# EAGLE board MotorCC (EAGLE 6.4)
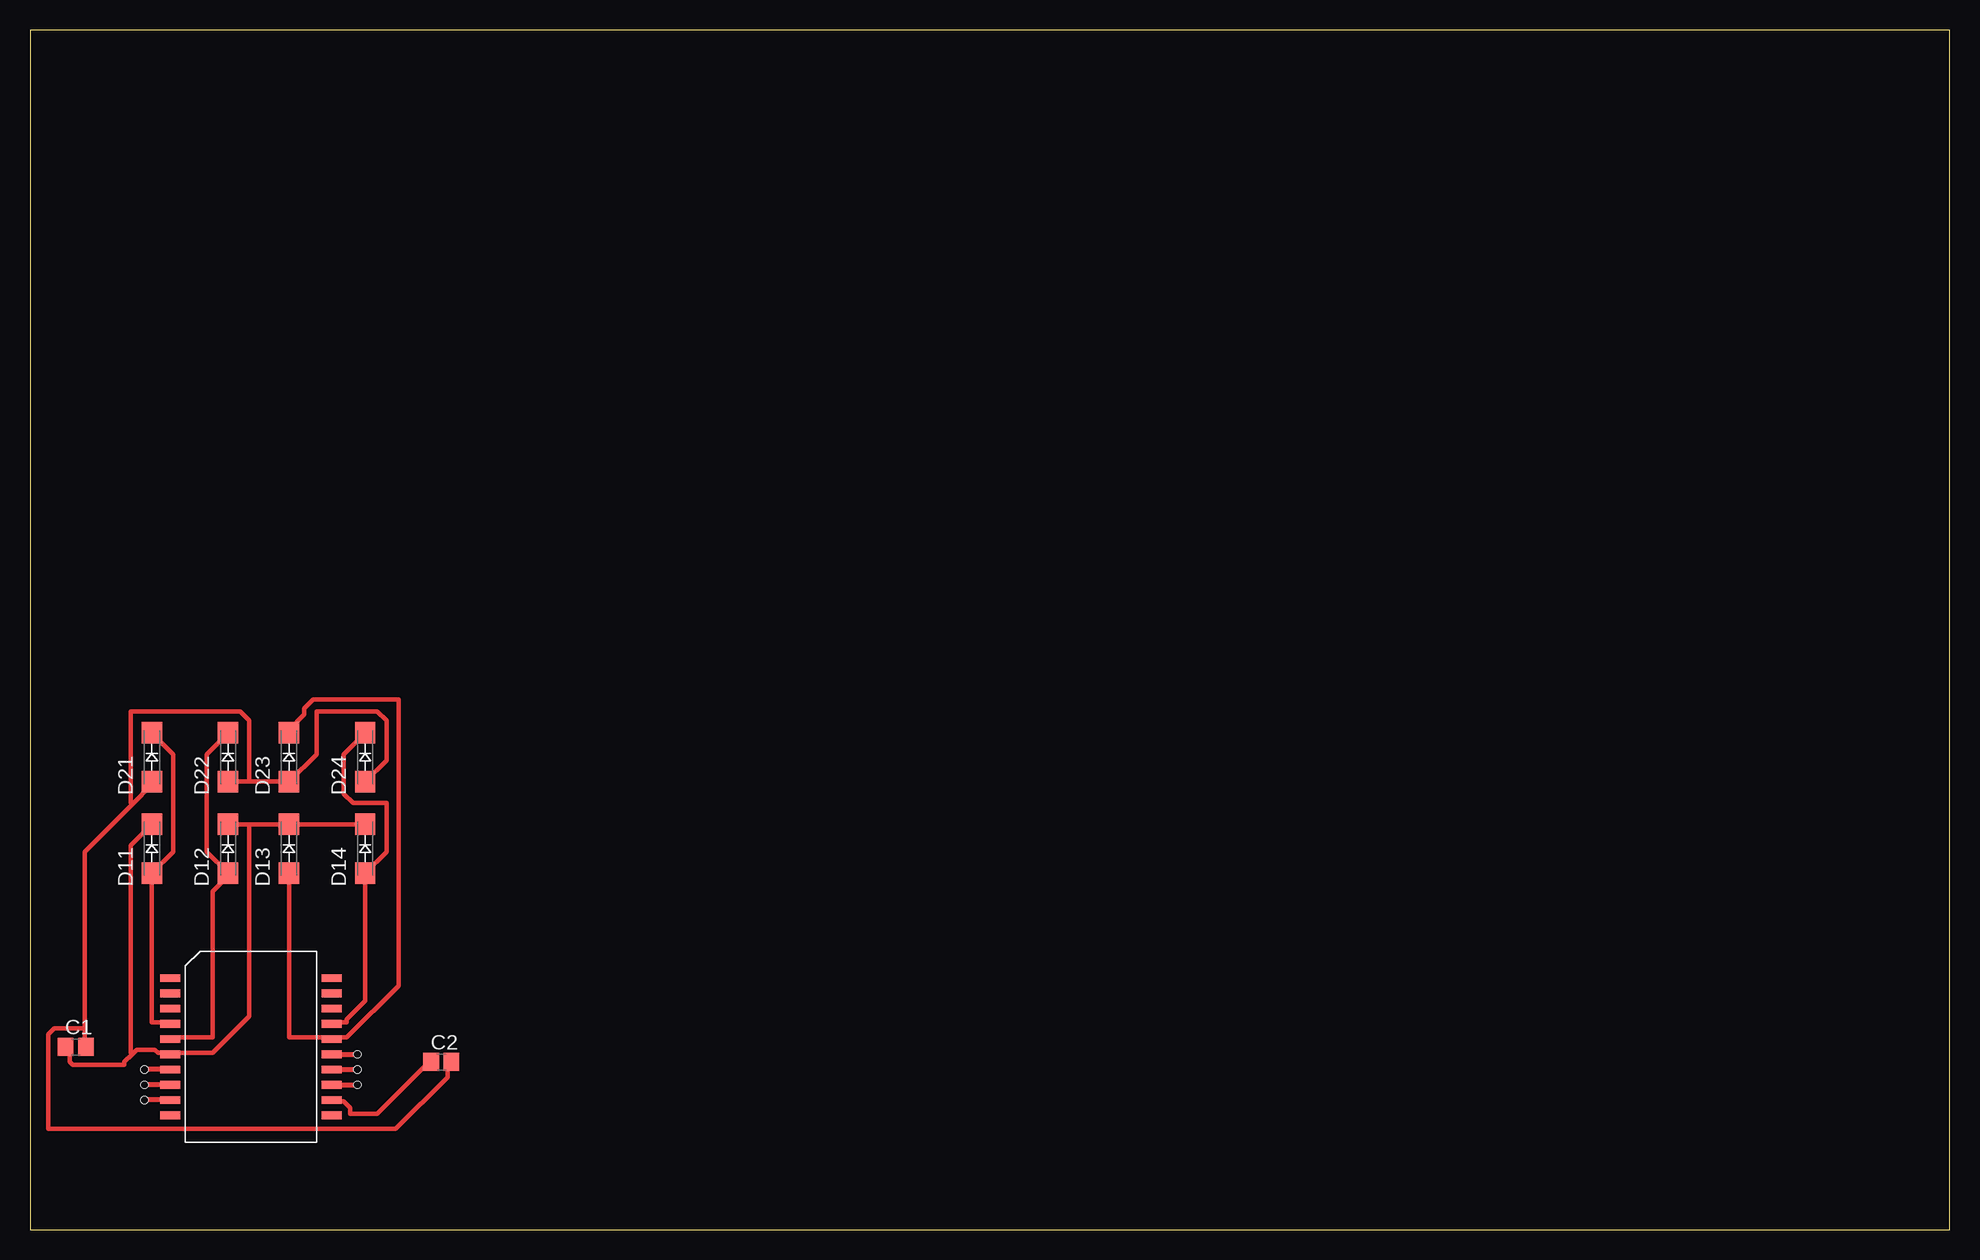
[diagram p0: board, top side]

Size 160 x 100 mm. Coordinates in mm from the lower left corner, seen from the top.
Outline: 0,0 160,0 160,100 0,100 0,0
Copper layers (1*16): Top 0.035mm / dielectric 1.5mm / Bottom 0.035mm
Design rules "default": minimum track width 10mil, minimum drill 24mil, track to track 8mil, track to pad 8mil, pad to pad 8mil, via to via 8mil, smd to smd 8mil, copper to edge 40mil, drill to drill 8mil, minimum pad ring 10mil, minimum via ring 8mil, stop-mask expansion 4mil, vias tented up to drill 0mil, thermal gap 10mil
Net classes: 0 default: width 0.381 mm, drill 0.508 mm, clearance 0.508 mm
Holes 0.6 mm at 9.53,13.34 9.53,12.06 9.53,10.79 27.3,12.06 27.3,13.34 27.3,14.61

## Footprints (pad centres in the part's own frame; a part is rotated, then mirrored left to right if it is on the bottom)
C0805 = smd 1.3 x 1.5: 1 -0.85,0; 2 0.85,0
SMA-DO214AC = smd 1.8 x 1.7: A -2.05,0; K 2.05,0
POWERSO20 = smd 1.651 x 0.635: 1 -6.731,5.715; 2 -6.731,4.445; 3 -6.731,3.175; 4 -6.731,1.905; 5 -6.731,0.635; 6 -6.731,-0.635; 7 -6.731,-1.905; 8 -6.731,-3.175; 9 -6.731,-4.445; 10 -6.731,-5.715; 11 6.731,-5.715; 12 6.731,-4.445; 13 6.731,-3.175; 14 6.731,-1.905; 15 6.731,-0.635; 16 6.731,0.635; 17 6.731,1.905; 18 6.731,3.175; 19 6.731,4.445; 20 6.731,5.715

## Placement (x,y rotation side)
C1  100nF  [C0805]  3.81,15.24 0 top
C2  100nF  [C0805]  34.29,13.97 0 top
D11  GF1  [SMA-DO214AC]  10.16,31.75 90 top
D12  GF1  [SMA-DO214AC]  16.51,31.75 90 top
D13  GF1  [SMA-DO214AC]  21.59,31.75 90 top
D14  GF1  [SMA-DO214AC]  27.94,31.75 90 top
D21  GF1  [SMA-DO214AC]  10.16,39.37 90 top
D22  GF1  [SMA-DO214AC]  16.51,39.37 90 top
D23  GF1  [SMA-DO214AC]  21.59,39.37 90 top
D24  GF1  [SMA-DO214AC]  27.94,39.37 90 top
U$1  L298_BRIDGE_DRIVER  [POWERSO20]  18.41,15.24 0 top

## Library data of the parts
C1 C2 = resistor
D11-D14 D21-D24 = diode
U$1 = SparkFun-PowerIC

## Nets
GND: C1.2 C2.2 D21.A D22.A D23.A D24.A
N$1: D11.A D21.K U$1.4
N$2: D12.A D22.K U$1.5
N$3: D13.A D23.K U$1.16
N$4: D14.A D24.K U$1.17
VCC: C2.1 U$1.12
VSS: C1.1 D11.K D12.K D13.K D14.K U$1.6

## Tracks (layer width: path | path; a pad name or v marks a point on that pad's centre or on a via)
GND
  Top 0.381: 21.59,37.34 18.29,37.34 | 18.29,37.34 16.51,37.34 D22.A | 21.59,37.34 23.88,39.62 23.88,43.18 28.96,43.18 29.72,42.42 29.72,39.12 27.94,37.34 D24.A | 21.59,37.34 D23.A | 4.57,16.76 2.03,16.76 1.52,16.26 1.52,8.38 30.48,8.38 34.8,12.7 34.8,13.72 35.05,13.97 C2.2 | 4.57,16.76 4.57,15.24 C1.2 | 8.51,35.43 4.57,31.5 4.57,16.76 | 8.51,35.43 10.16,37.08 D21.A | 18.29,37.34 18.29,42.42 17.53,43.18 8.38,43.18 8.38,35.56 8.51,35.43
N$1
  Top 0.381: U$1.4 11.68,17.27 10.16,17.27 D11.A 10.16,29.72 11.94,31.5 11.94,39.62 10.16,41.4 D21.K
N$2
  Top 0.381: U$1.5 11.68,16 15.24,16 15.24,28.19 16.51,29.46 D12.A 16.51,29.72 14.73,31.5 14.73,39.62 16.51,41.4 D22.K
N$3
  Top 0.381: 25.15,16 21.59,16 D13.A | 25.15,16 26.42,16 30.73,20.32 30.73,44.2 23.62,44.2 22.86,43.43 22.86,42.93 21.59,41.66 D23.K | 25.15,16 U$1.16
N$4
  Top 0.381: U$1.17 25.15,17.27 26.42,17.27 26.42,17.53 27.94,19.05 D14.A 27.94,29.72 29.72,31.5 29.72,35.56 26.92,35.56 26.16,36.32 26.16,39.62 27.94,41.4 D24.K
N$5
  Top 0.406: 25.4,14.61 27.3,14.61
N$6
  Top 0.406: 25.4,13.34 27.3,13.34
N$7
  Top 0.406: 25.4,12.06 27.3,12.06
N$8
  Top 0.406: 11.43,10.79 9.53,10.79
N$9
  Top 0.406: 11.43,12.06 9.53,12.06
N$10
  Top 0.406: 11.43,13.34 9.53,13.34
VCC
  Top 0.381: C2.1 33.27,13.97 28.96,9.65 26.67,9.65 26.67,10.16 26.16,10.67 25.15,10.67 U$1.12
VSS
  Top 0.381: 21.59,33.78 18.29,33.78 | 18.29,33.78 16.51,33.78 D12.K | 21.59,33.78 27.94,33.78 D14.K | 21.59,33.78 D13.K | 8.51,14.61 8.89,14.99 10.41,14.99 10.67,14.73 11.68,14.73 | 8.51,14.61 7.87,13.97 7.87,13.72 3.56,13.72 3.3,13.97 3.3,14.99 3.05,15.24 C1.1 | D11.K 10.16,33.78 8.38,32 8.38,14.73 8.51,14.61 | 18.29,33.78 18.29,17.78 15.24,14.73 11.68,14.73 | 11.68,14.73 U$1.6